# EAGLE board driverV2 (EAGLE 8.6.0)
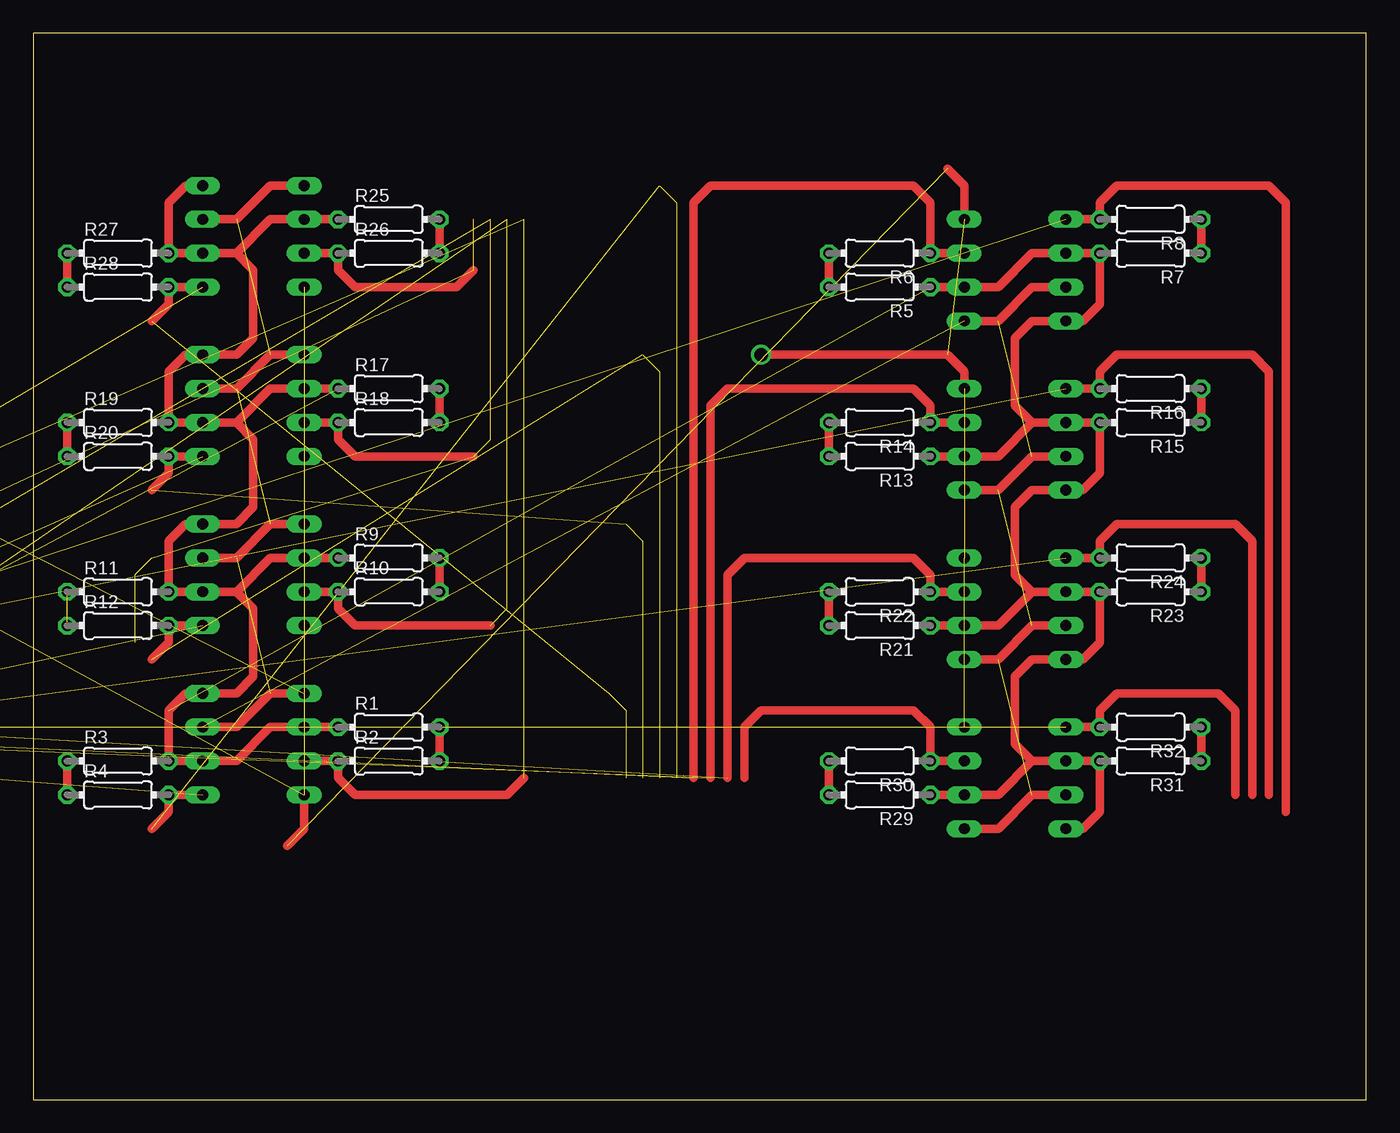
[diagram p0: board, top side]
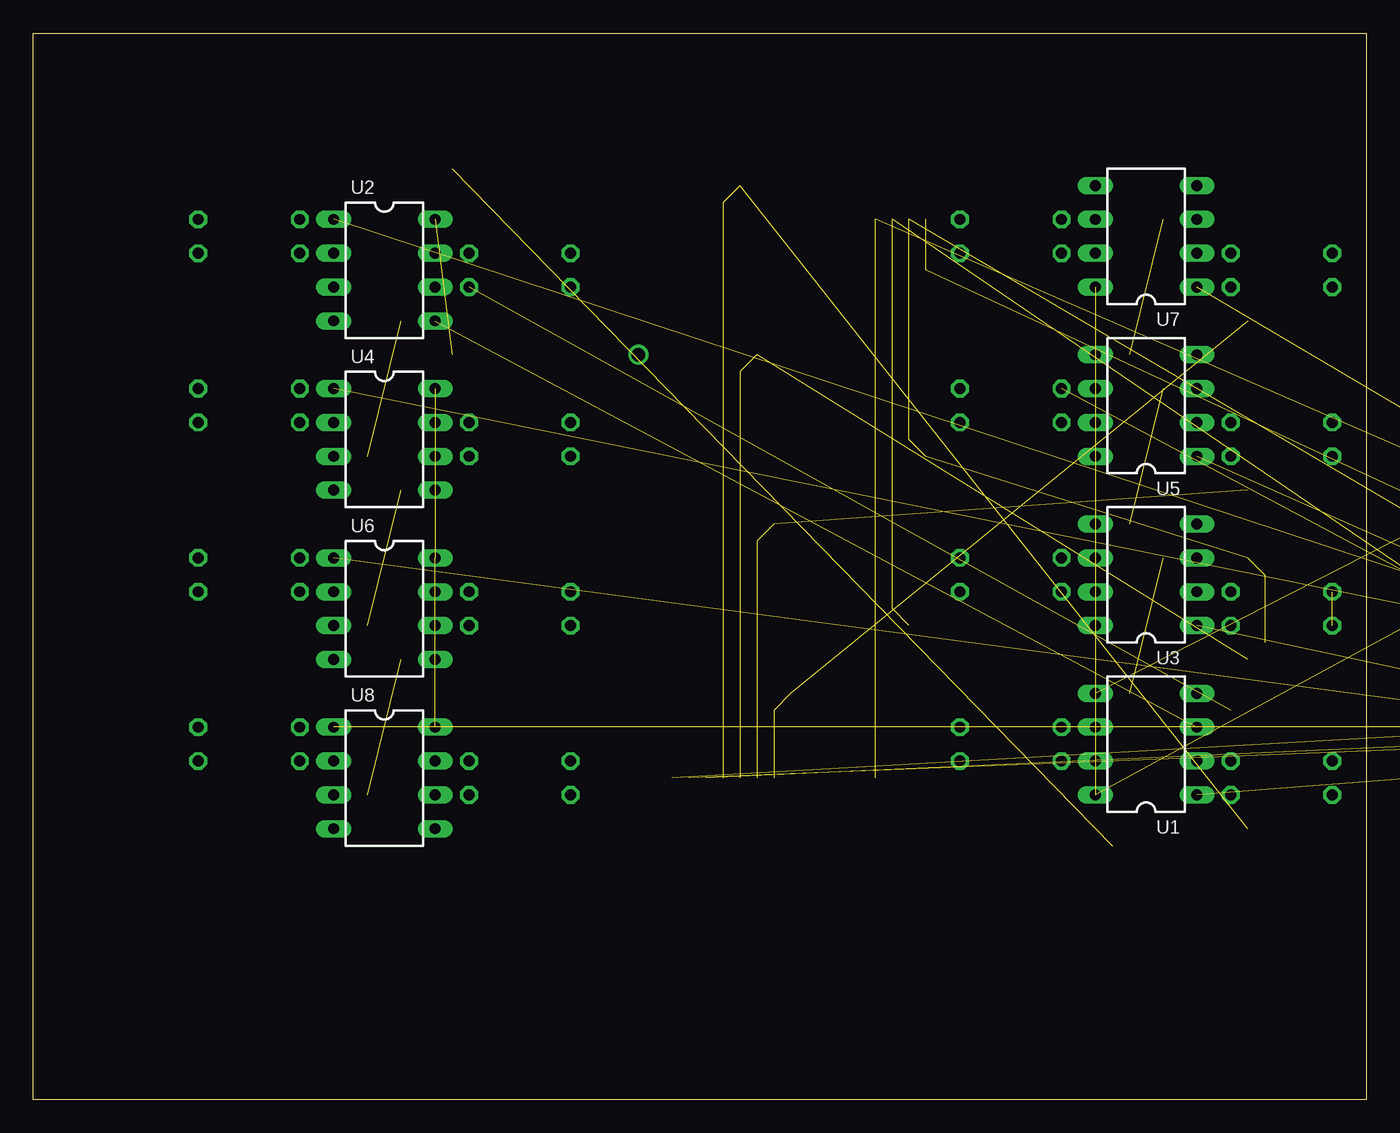
[diagram p1: board, bottom side, seen from below]

Size 100 x 80 mm. Coordinates in mm from the lower left corner, seen from the top.
Outline: 0,0 100,0 100,80 0,80 0,0
Copper layers (1*16): Top 0.035mm / dielectric 1.5mm / Bottom 0.035mm
Design rules "default *": minimum track width 6mil, minimum drill 0.35mm, track to track 0.55mm, track to pad 0.55mm, pad to pad 0.55mm, via to via 0.55mm, smd to smd 6mil, copper to edge 40mil, drill to drill 6mil, minimum pad ring 10mil, minimum via ring 8mil, stop-mask expansion 4mil, vias tented up to drill 0mil, thermal gap 10mil

## Footprints (pad centres in the part's own frame; a part is rotated, then mirrored left to right if it is on the bottom)
1X04 = drill 1.016 long: 1 -3.81,0; 2 -1.27,0; 3 1.27,0; 4 3.81,0
1X16 = drill 1.016 long: 1 -19.05,0; 2 -16.51,0; 3 -13.97,0; 4 -11.43,0; 5 -8.89,0; 6 -6.35,0; 7 -3.81,0; 8 -1.27,0; 9 1.27,0; 10 3.81,0; 11 6.35,0; 12 8.89,0; 13 11.43,0; 14 13.97,0; 15 16.51,0; 16 19.05,0
LED_LD260 = drill 0.813 octagon: A -1.27,0; K 1.27,0
0204/7 = drill 0.813 octagon: 1 -3.81,0; 2 3.81,0
DIL08 = drill 0.813 long: 1 -3.81,-3.81; 2 -1.27,-3.81; 3 1.27,-3.81; 4 3.81,-3.81; 5 3.81,3.81; 6 1.27,3.81; 7 -1.27,3.81; 8 -3.81,3.81

## Placement (x,y rotation side)
JP1  [1X04]  -60.96,27.94 0 top  (outside the outline)
JP2  [1X16]  -34.29,27.94 0 top  (outside the outline)
LED1  [LED_LD260]  -16.51,33.02 0 top  (outside the outline)
LED2  [LED_LD260]  -21.59,33.02 0 top  (outside the outline)
R1  100k  [0204/7]  26.67,27.94 0 top
R2  470k  [0204/7]  26.67,25.4 0 top
R3  100k  [0204/7]  6.35,25.4 0 top
R4  470k  [0204/7]  6.35,22.86 0 top
R5  100k  [0204/7]  63.5,60.96 180 top
R6  470k  [0204/7]  63.5,63.5 180 top
R7  100k  [0204/7]  83.82,63.5 180 top
R8  470k  [0204/7]  83.82,66.04 180 top
R9  100k  [0204/7]  26.67,40.64 0 top
R10  470k  [0204/7]  26.67,38.1 0 top
R11  100k  [0204/7]  6.35,38.1 0 top
R12  470k  [0204/7]  6.35,35.56 0 top
R13  100k  [0204/7]  63.5,48.26 180 top
R14  470k  [0204/7]  63.5,50.8 180 top
R15  100k  [0204/7]  83.82,50.8 180 top
R16  470k  [0204/7]  83.82,53.34 180 top
R17  100k  [0204/7]  26.67,53.34 0 top
R18  470k  [0204/7]  26.67,50.8 0 top
R19  100k  [0204/7]  6.35,50.8 0 top
R20  470k  [0204/7]  6.35,48.26 0 top
R21  100k  [0204/7]  63.5,35.56 180 top
R22  470k  [0204/7]  63.5,38.1 180 top
R23  100k  [0204/7]  83.82,38.1 180 top
R24  470k  [0204/7]  83.82,40.64 180 top
R25  100k  [0204/7]  26.67,66.04 0 top
R26  470k  [0204/7]  26.67,63.5 0 top
R27  100k  [0204/7]  6.35,63.5 0 top
R28  470k  [0204/7]  6.35,60.96 0 top
R29  100k  [0204/7]  63.5,22.86 180 top
R30  470k  [0204/7]  63.5,25.4 180 top
R31  100k  [0204/7]  83.82,25.4 180 top
R32  470k  [0204/7]  83.82,27.94 180 top
R33  470k  [0204/7]  -48.26,63.5 0 top  (outside the outline)
R34  470k  [0204/7]  -58.42,63.5 0 top  (outside the outline)
U1  NE5532N  [DIL08]  16.51,26.67 90 bottom
U2  NE5532N  [DIL08]  73.66,62.23 270 bottom
U3  NE5532N  [DIL08]  16.51,39.37 90 bottom
U4  NE5532N  [DIL08]  73.66,49.53 270 bottom
U5  NE5532N  [DIL08]  16.51,52.07 90 bottom
U6  NE5532N  [DIL08]  73.66,36.83 270 bottom
U7  NE5532N  [DIL08]  16.51,64.77 90 bottom
U8  NE5532N  [DIL08]  73.66,24.13 270 bottom

## Library data of the parts
JP1 JP2 = pinhead
LED1 LED2 = eagle-ltspice; SPICEMODEL: NONE; SPICEPREFIX: D; SPICETYPE: diode
R1-R34 = resistor
U1-U8 = op-amp

## Nets
1: JP2.1 R4.2 U1.1
2: JP2.2 R2.1 U1.7
3: JP2.3 R16.2 U4.1
4: JP2.4 R14.1 U4.7
5: JP2.5 R28.2 U7.1
6: JP2.6 R26.1 U7.7
7: JP2.7 R8.2 U2.1
8: JP2.8 R6.1 U2.7
9: JP2.9 R20.2 U5.1
10: JP2.10 R18.1 U5.7
11: JP2.11 R32.2 U8.1
12: JP2.12 R30.1 U8.7
13: JP2.13 R12.2 U3.1
14: JP2.14 R10.1 U3.7
15: JP2.15 R24.2 U6.1
16: JP2.16 R22.1 U6.7
GND: JP1.1 JP1.4 LED1.K LED2.K R1.1 R3.2 R5.1 R7.2 R9.1 R11.2 R13.1 R15.2 R17.1 R19.2 R21.1 R23.2 R25.1 R27.2 R29.1 R31.2 U1.2 U1.4 U1.6 U2.2 U2.4 U2.6 U3.2 U3.4 U3.6 U4.2 U4.4 U4.6 U5.2 U5.4 U5.6 U6.2 U6.4 U6.6 U7.2 U7.4 U7.6 U8.2 U8.4 U8.6
N$1: R5.2 R6.2
N$2: R1.2 R2.2
N$3: R7.1 R8.1
N$4: R9.2 R10.2
N$5: R3.1 R4.1
N$6: R11.1 R12.1
N$7: R13.2 R14.2
N$8: R15.1 R16.1
N$9: R17.2 R18.2
N$10: R19.1 R20.1
N$11: R21.2 R22.2
N$12: R23.1 R24.1
N$13: R25.2 R26.2
N$14: R27.1 R28.1
N$15: R29.2 R30.2
N$16: R31.1 R32.1
N$17: LED1.A R33.1
N$18: LED2.A R34.1
SYG: JP1.2 R33.2 U1.3 U1.5 U2.3 U2.5 U3.3 U3.5 U4.3 U4.5 U5.3 U5.5 U6.3 U6.5 U7.3 U7.5 U8.3 U8.5
VCC: JP1.3 R34.2 U1.8 U2.8 U3.8 U4.8 U5.8 U6.8 U7.8 U8.8

## Tracks (layer width: path | path; a pad name or v marks a point on that pad's centre or on a via)
1  (4 unrouted)
  Top 0.635: U1.1 R4.2 10.16,21.59 8.89,20.32
2  (2 unrouted)
  Top 0.635: U1.7 R2.1 22.86,24.13 24.13,22.86 35.56,22.86 36.83,24.13
3  (1 unrouted)
  Top 0.635: U4.1 R16.2 80.01,54.61 81.28,55.88 91.44,55.88 92.71,54.61 92.71,22.86
4  (1 unrouted)
  Top 0.635: U4.7 R14.1 67.31,52.07 66.04,53.34 52.07,53.34 50.8,52.07 50.8,24.13
5  (4 unrouted)
  Top 0.635: U7.1 R28.2 10.16,59.69 8.89,58.42
6  (2 unrouted)
  Top 0.635: U7.7 R26.1 22.86,62.23 24.13,60.96 31.75,60.96 33.02,62.23
7  (1 unrouted)
  Top 0.635: U2.1 R8.2 80.01,67.31 81.28,68.58 92.71,68.58 93.98,67.31 93.98,21.59
8  (1 unrouted)
  Top 0.635: U2.7 R6.1 67.31,67.31 66.04,68.58 50.8,68.58 49.53,67.31 49.53,24.13
9  (4 unrouted)
  Top 0.635: U5.1 R20.2 10.16,46.99 8.89,45.72
10  (6 unrouted)
  Top 0.635: U5.7 R18.1 22.86,49.53 24.13,48.26 33.02,48.26
11  (1 unrouted)
  Top 0.635: U8.1 R32.2 80.01,29.21 81.28,30.48 88.9,30.48 90.17,29.21 90.17,22.86
12  (1 unrouted)
  Top 0.635: U8.7 R30.1 67.31,27.94 66.04,29.21 54.61,29.21 53.34,27.94 53.34,24.13
13  (4 unrouted)
  Top 0.635: U3.1 R12.2 10.16,34.29 8.89,33.02
14  (3 unrouted)
  Top 0.635: U3.7 R10.1 22.86,36.83 24.13,35.56 34.29,35.56
15  (1 unrouted)
  Top 0.635: U6.1 R24.2 80.01,41.91 81.28,43.18 90.17,43.18 91.44,41.91 91.44,22.86
16  (1 unrouted)
  Top 0.635: U6.7 R22.1 67.31,39.37 66.04,40.64 53.34,40.64 52.07,39.37 52.07,24.13
GND  (5 unrouted)
  Top 0.635: R1.1 U1.6 17.78,27.94 15.24,25.4 U1.2 R3.2 10.16,29.21 11.43,30.48 U1.4 15.24,30.48 16.51,31.75 16.51,36.83 15.24,38.1 | R5.1 U2.6 72.39,60.96 74.93,63.5 U2.2 R7.2 80.01,59.69 78.74,58.42 U2.4 74.93,58.42 73.66,57.15 73.66,52.07 74.93,50.8 | R9.1 U3.6 17.78,40.64 15.24,38.1 | 74.93,50.8 U4.2 R15.2 80.01,46.99 78.74,45.72 U4.4 74.93,45.72 73.66,44.45 73.66,39.37 74.93,38.1 | R13.1 U4.6 72.39,48.26 74.93,50.8 | 15.24,38.1 U3.2 R11.2 10.16,41.91 11.43,43.18 U3.4 15.24,43.18 16.51,44.45 16.51,49.53 15.24,50.8 | 15.24,50.8 U5.2 R19.2 10.16,54.61 11.43,55.88 U5.4 15.24,55.88 16.51,57.15 16.51,62.23 15.24,63.5 | 15.24,50.8 17.78,53.34 U5.6 R17.1 | 15.24,63.5 U7.2 R27.2 10.16,67.31 11.43,68.58 U7.4 | 15.24,63.5 17.78,66.04 U7.6 R25.1 | R21.1 U6.6 72.39,35.56 74.93,38.1 | R29.1 U8.6 72.39,22.86 74.93,25.4 | U8.4 78.74,20.32 80.01,21.59 R31.2 U8.2 74.93,25.4 | 74.93,38.1 U6.2 R23.2 80.01,34.29 78.74,33.02 U6.4 74.93,33.02 73.66,31.75 73.66,26.67 74.93,25.4
N$1
  Top 0.635: R6.2 R5.2
N$2
  Top 0.635: R2.2 R1.2
N$3
  Top 0.635: R8.1 R7.1
N$4
  Top 0.635: R10.2 R9.2
N$5
  Top 0.635: R4.1 R3.1
N$6  (1 unrouted)
N$7
  Top 0.635: R14.2 R13.2
N$8
  Top 0.635: R16.1 R15.1
N$9
  Top 0.635: R18.2 R17.2
N$10
  Top 0.635: R20.1 R19.1
N$11
  Top 0.635: R22.2 R21.2
N$12
  Top 0.635: R24.1 R23.1
N$13
  Top 0.635: R26.2 R25.2
N$14
  Top 0.635: R28.1 R27.1
N$15
  Top 0.635: R30.2 R29.2
N$16
  Top 0.635: R32.1 R31.1
N$17  (1 unrouted)
N$18  (1 unrouted)
SYG  (9 unrouted)
  Top 0.635: U1.5 17.78,30.48 15.24,27.94 U1.3 | U2.3 74.93,60.96 72.39,58.42 U2.5 | U3.5 17.78,43.18 15.24,40.64 U3.3 | U4.5 72.39,45.72 74.93,48.26 U4.3 | U5.5 17.78,55.88 15.24,53.34 U5.3 | U7.5 17.78,68.58 15.24,66.04 U7.3 | U8.5 72.39,20.32 74.93,22.86 U8.3 | U6.5 72.39,33.02 74.93,35.56 U6.3
VCC  (via drill 1 pad 1.5)  (9 unrouted)
  Top 0.635: 19.05,19.05 20.32,20.32 U1.8 | 68.58,69.85 69.85,68.58 U2.8 | U4.8 69.85,54.61 68.58,55.88 v54.61,55.88